# EAGLE board vfd_dclink (EAGLE 9.2.2)
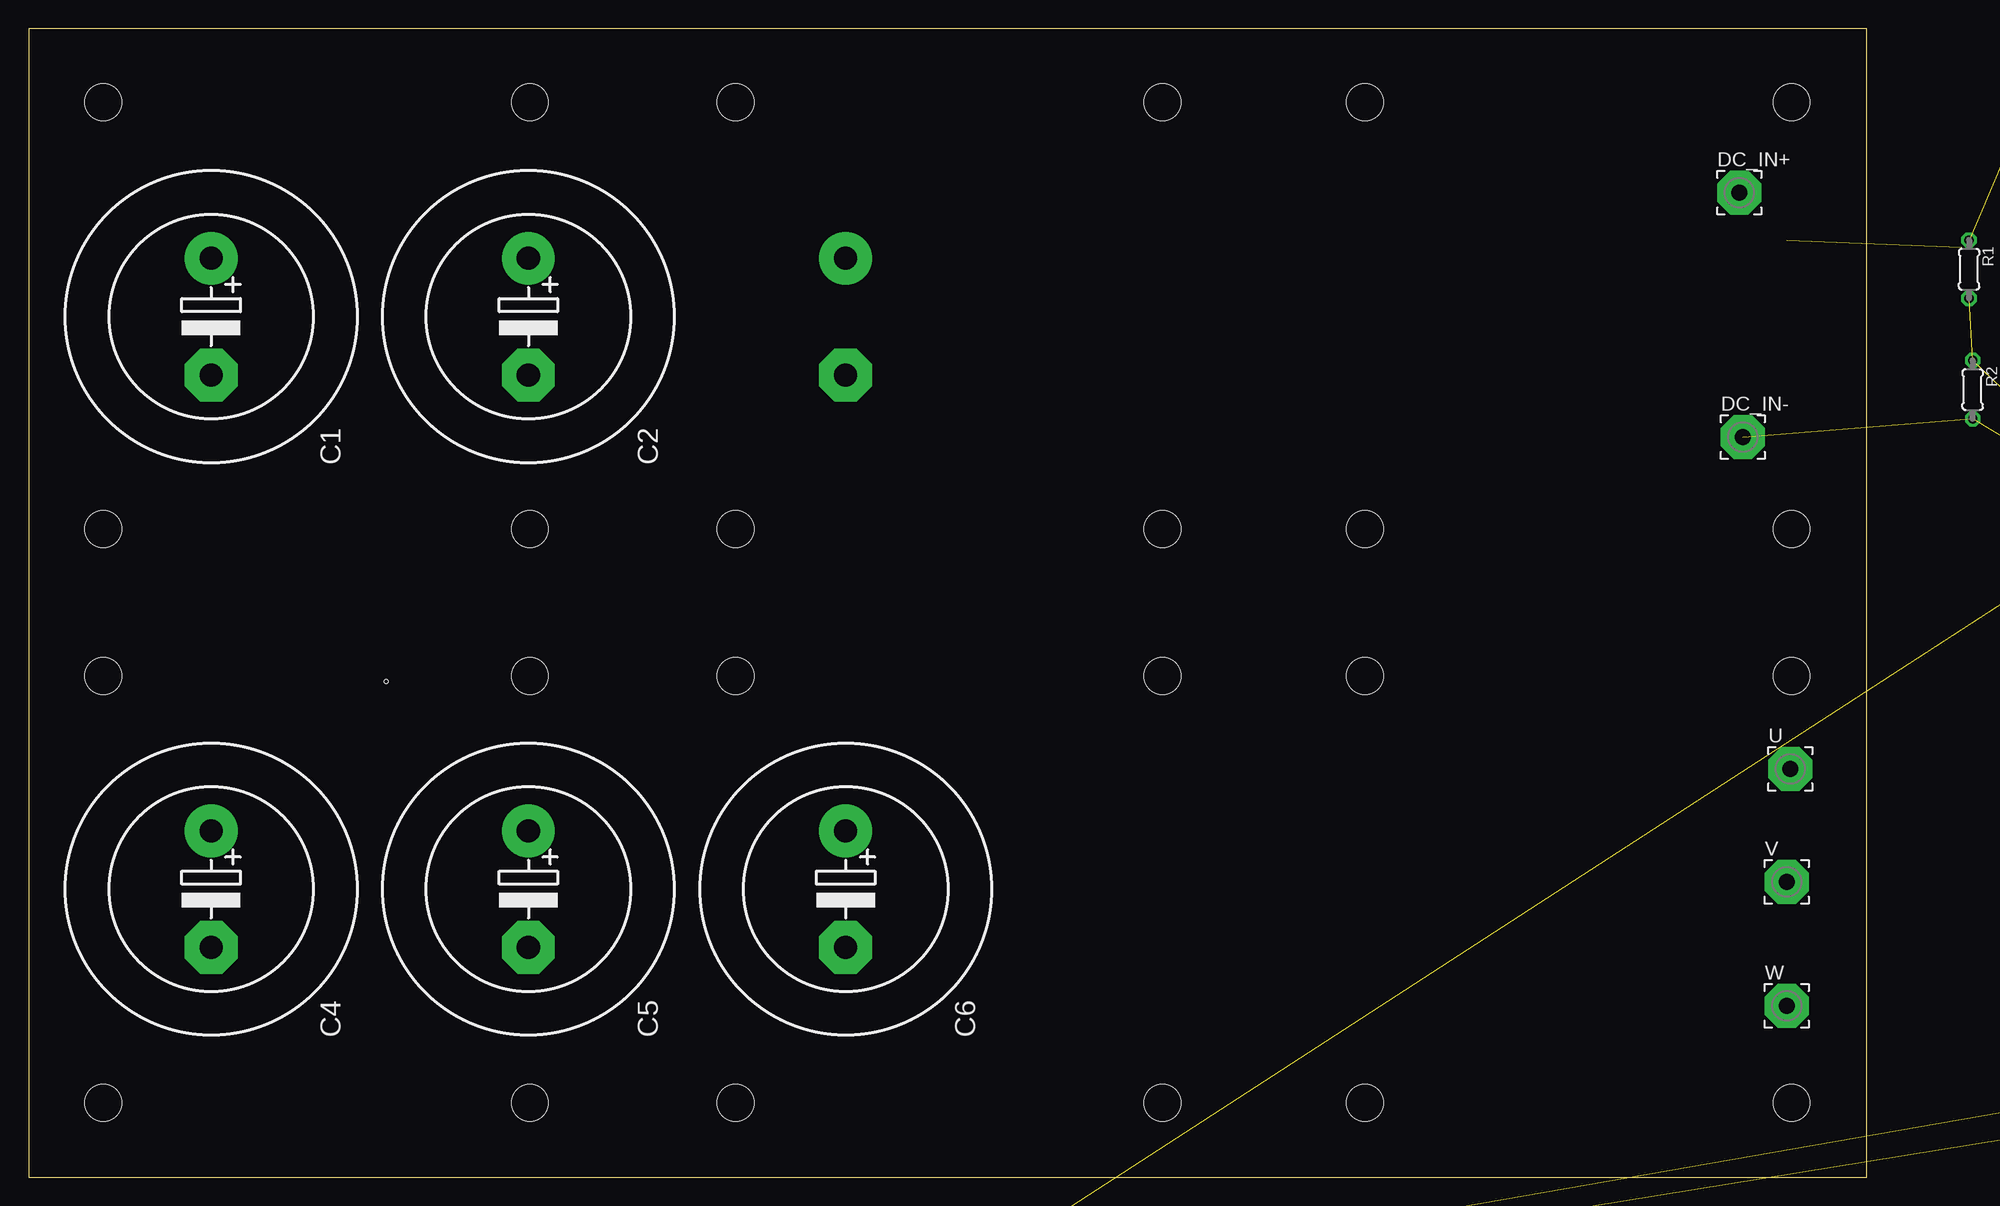
[diagram p0: board, top side]
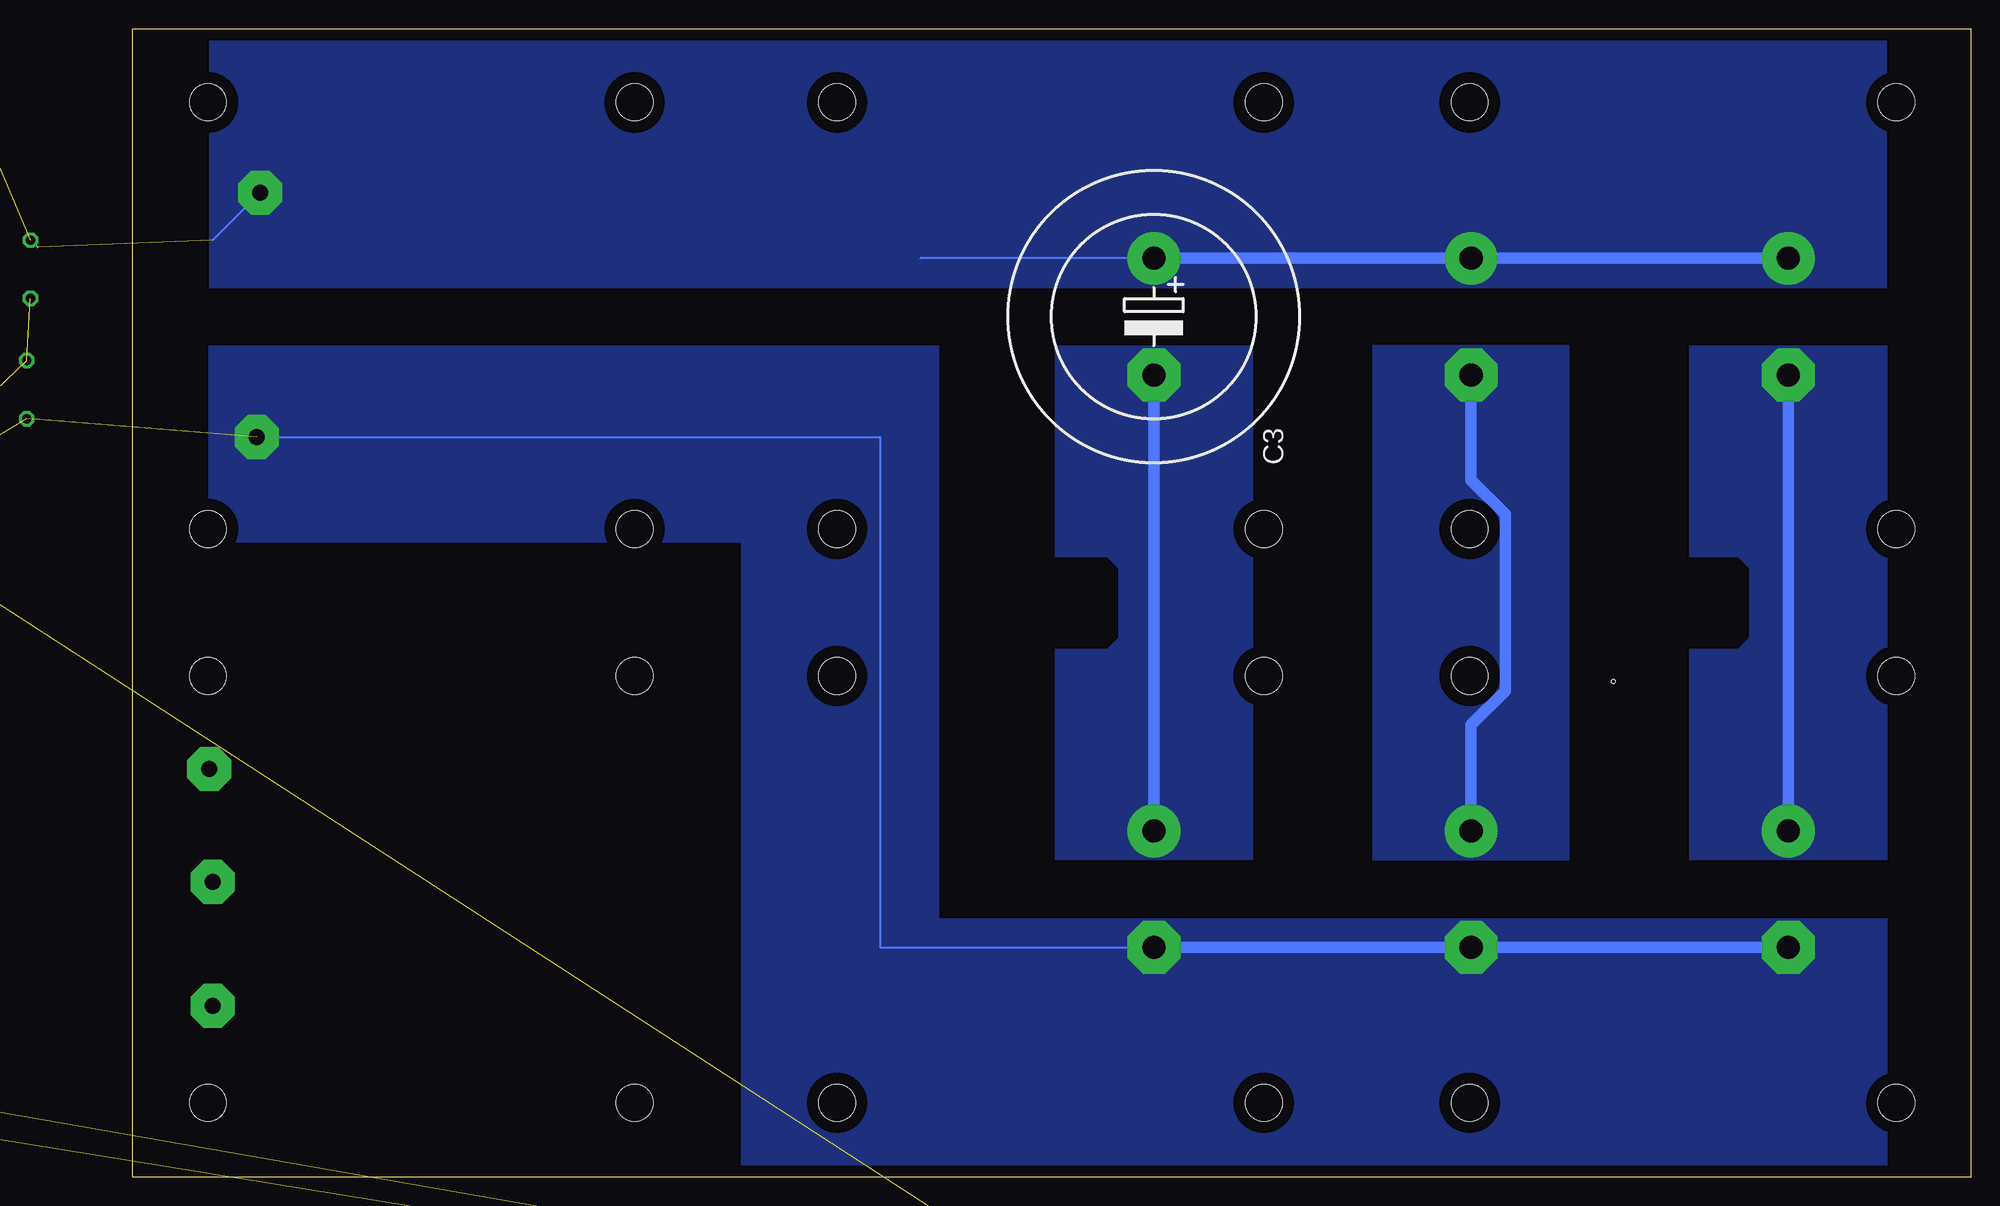
[diagram p1: board, bottom side, seen from below]

Size 160 x 100 mm. Coordinates in mm from the lower left corner, seen from the top.
Outline: 0,0 160,0 160,100 0,100 0,0
Copper layers (1*16): Top 0.035mm / dielectric 0.15mm / Bottom 0.035mm
Design rules "default": minimum track width 6mil, minimum drill 0.35mm, track to track 6mil, track to pad 6mil, pad to pad 6mil, via to via 6mil, smd to smd 6mil, copper to edge 40mil, drill to drill 6mil, minimum pad ring 10mil, minimum via ring 8mil, stop-mask expansion 4mil, vias tented up to drill 0mil, thermal gap 10mil
Holes 3.2 mm at 6.48,93.58 6.48,56.44 43.62,93.58 43.62,56.44 6.48,43.64 6.48,6.5 43.62,43.64 43.62,6.5 116.31,93.58 116.31,56.44 153.46,93.58 153.46,56.44 116.31,43.64 116.31,6.5 153.46,43.64 153.46,6.5 61.55,93.58 61.55,56.44 98.7,93.58 98.7,56.44 61.55,43.64 61.55,6.5 98.7,43.64 98.7,6.5
Holes 0.35 mm at 31.11,43.18
bRestrict: area 19.4,46 to 30.8,54; area 74.3,46 to 85.7,54; area 129.2,46 to 140.7,54

## Footprints (pad centres in the part's own frame; a part is rotated, then mirrored left to right if it is on the bottom)
EB25D = drill 2.007 pad 4.597: + -5.08,0 | drill 2.007 pad 4.597 octagon: - 5.08,0
C025-030X050 = drill 0.813 octagon: 1 -1.27,0; 2 1.27,0
NMA = drill 0.813 long: 1 0,6.35; 2 0,3.81; 4 0,-1.27; 5 0,-3.81; 6 0,-6.35
3,81/1,4 = drill 1.397 pad 3.81 octagon: 1 0,0
CB-PFF = drill 0.8 pad 1.5: 1 -1.91,-21.4; 2 0,-21.4; 3 1.91,-21.4 | drill 2 pad 4 offset: IP+ 7,0; IP- -7,0 | drill 0.5 pad 0.9: IP+@2 8.89,0.635; IP+@3 8.89,-0.635; IP+@4 8.175,-1.625; IP+@5 7,-2; IP+@6 5.675,-2; IP+@7 4.35,-2; IP+@8 3,-2; IP+@9 1.825,-1.625; IP+@10 1.1,-0.625; IP+@11 1.1,0.625; IP+@12 1.825,1.625; IP+@13 3,2; IP+@14 4.35,2; IP+@15 5.675,2; IP+@16 7,2; IP+@17 8.175,1.625; IP-@2 -8.89,0.635; IP-@3 -8.89,-0.635; IP-@4 -8.175,-1.625; IP-@5 -7,-2; IP-@6 -5.675,-2; IP-@7 -4.325,-2; IP-@8 -3,-2; IP-@9 -1.825,-1.625; IP-@10 -1.1,-0.625; IP-@11 -1.1,0.625; IP-@12 -1.825,1.625; IP-@13 -3,2; IP-@14 -4.325,2; IP-@15 -5.675,2; IP-@16 -7,2; IP-@17 -8.175,1.625
DIL08 = drill 0.813 pad 1.3: 1 -3.81,-3.81; 2 -1.27,-3.81; 3 1.27,-3.81; 4 3.81,-3.81; 5 3.81,3.81; 6 1.27,3.81; 7 -1.27,3.81; 8 -3.81,3.81
F061.080 = drill 1.1 pad 2.54 long: 1A -2.5,0; 1B 2.5,0
0204/5 = drill 0.813 octagon: 1 -2.54,0; 2 2.54,0

## Placement (x,y rotation side)
C1  BE LXS 120/450  [EB25D]  15.88,74.93 270 top
C2  BE LXS 120/450  [EB25D]  43.5,74.93 270 top
C3  BE LXS 120/450  [EB25D]  71.12,74.93 270 bottom
C4  BE LXS 120/450  [EB25D]  15.88,25.08 270 top
C5  BE LXS 120/450  [EB25D]  43.5,25.08 270 top
C6  BE LXS 120/450  [EB25D]  71.12,25.08 270 top
C7  100n  [C025-030X050]  -47.31,-32.38 0 top  (outside the outline)
C8  0,47µ  [C025-030X050]  -47.31,-39.69 0 top  (outside the outline)
C10  0,47µ  [C025-030X050]  -47.31,-54.29 0 top  (outside the outline)
DC1  MEV1S0512SC  [NMA]  186.69,1.91 0 top  (outside the outline)
DC_IN+  [3,81/1,4]  148.91,85.72 0 top
DC_IN-  [3,81/1,4]  149.22,64.45 0 top
DC_OUT+  [3,81/1,4]  99.06,116.52 0 top  (outside the outline)
DC_OUT-  [3,81/1,4]  178.12,31.75 0 top  (outside the outline)
IC1  ACS758  [CB-PFF]  184.15,123.51 0 top  (outside the outline)
IC2  HCPL-7840  [DIL08]  189.55,56.83 0 top  (outside the outline)
J1  +5V  [F061.080]  -59.37,-81.92 0 top  (outside the outline)
J2  GND  [F061.080]  -59.37,-87.31 0 top  (outside the outline)
J3  USENSE  [F061.080]  -59.37,-92.71 0 top  (outside the outline)
J4  ISENSE  [F061.080]  -59.37,-98.11 0 top  (outside the outline)
R1  [0204/5]  168.91,79.06 270 top  (outside the outline)
R2  [0204/5]  169.23,68.58 270 top  (outside the outline)
U  [3,81/1,4]  153.35,35.56 0 top
V  [3,81/1,4]  153.03,25.72 0 top
W  [3,81/1,4]  153.03,14.92 0 top

## Library data of the parts
C1-C8 C10 R1 R2 = resistor
DC1 = dc-dc-converter; MF: C & D TECHNOLOGIES, INC; MPN: NMA0515SC; OC_FARNELL: 1021434; OC_NEWARK: 61K3064
DC_IN+ DC_IN- DC_OUT+ DC_OUT- U V W = wirepad
IC1 = allegro; MPN: ACS758ECB-200B-PFF-T; OC_FARNELL: 1718993; OC_NEWARK: 04R7127
IC2 = avago; MPN: HCPL-7800A#500; OC_FARNELL: 459446; OC_NEWARK: 05M6395
J1-J4 = con-faston; OC_FARNELL: unknown; OC_NEWARK: unknown

## Nets
+5V: C7.2 C10.1 DC1.1 IC1.1 IC2.8 J1.1A J1.1B
DC_IN+: C1.+ C2.+ C3.+ DC_IN+.1 IC1.IP+ IC1.IP+@2 IC1.IP+@3 IC1.IP+@4 IC1.IP+@5 IC1.IP+@6 IC1.IP+@7 IC1.IP+@8 IC1.IP+@9 IC1.IP+@10 IC1.IP+@11 IC1.IP+@12 IC1.IP+@13 IC1.IP+@14 IC1.IP+@15 IC1.IP+@16 IC1.IP+@17 R1.1
DC_IN-: C4.- C5.- C6.- DC_IN-.1 DC_OUT-.1 IC2.3 R2.2
GND: C7.1 C10.2 DC1.2 IC1.2 IC2.5 IC2.6 J2.1A J2.1B
GNDI: C8.1 DC1.5 IC2.4
ISENSE: IC1.3 IC2.7 J4.1A J4.1B
N$1: DC_OUT+.1 IC1.IP- IC1.IP-@2 IC1.IP-@3 IC1.IP-@4 IC1.IP-@5 IC1.IP-@6 IC1.IP-@7 IC1.IP-@8 IC1.IP-@9 IC1.IP-@10 IC1.IP-@11 IC1.IP-@12 IC1.IP-@13 IC1.IP-@14 IC1.IP-@15 IC1.IP-@16 IC1.IP-@17
N$4: C8.2 DC1.6 IC2.1
N$8: C1.- C4.+
N$9: C2.- C5.+
N$10: C3.- C6.+
N$11: IC2.2 R1.2 R2.1
USENSE: J3.1A J3.1B

## Tracks (layer width: path | path; a pad name or v marks a point on that pad's centre or on a via)
+5V  (6 unrouted)
DC_IN+  (2 unrouted)
  Bottom 0.152: C3.+ 91.44,80.01 | 168.29,80.98 R1.1 | DC_IN+.1 153.03,81.6
  Bottom 1: C1.+ C2.+ C3.+
  pour Bottom (no thermals): 153.35,77.47 7.3,77.47 7.3,100.01 153.35,100.01
DC_IN-  (3 unrouted)
  Bottom 0.152: DC_IN-.1 94.93,64.45 94.93,20 C6.-
  Bottom 1: C4.- C5.- C6.-
  pour Bottom (no thermals): 107,22.54 7.3,22.54 7.3,0 107,0
  pour Bottom (no thermals): 107,72.39 89.85,72.39 89.85,22.54 107,22.54
  pour Bottom (no thermals): 107,72.39 107,55.24 153.35,55.24 153.35,72.39
GND  (7 unrouted)
GNDI  (2 unrouted)
ISENSE  (3 unrouted)
N$1  (1 unrouted)
N$4  (2 unrouted)
N$8
  Bottom 1: C1.- C4.+
  pour Bottom (no thermals): 24.45,72.39 7.3,72.39 7.3,27.62 24.45,27.62
N$9
  Bottom 1: C2.- 43.5,60.72 40.51,57.73 40.51,42.35 43.5,39.36 C5.+
  pour Bottom (no thermals): 43.5,27.62 34.92,27.62 34.92,72.39 47.31,72.39 52.07,72.39 52.07,27.62
N$10
  Bottom 1: C3.- C6.+
  pour Bottom (no thermals): 70.8,72.39 62.55,72.39 62.55,27.62 79.69,27.62 79.69,33.02 79.69,72.39
N$11  (2 unrouted)
USENSE  (1 unrouted)